# Altium PCB STM32F10XV.PCBDOC (part 1 of 2)
Units mm, origin at the board's own origin, x right, y up, seen from the top; angles counter-clockwise.
Board outline 45.75 x 66.52 mm, 2 copper layers (Top Layer, Bottom Layer); 58 components, 99 nets, 365 pads, 37 vias.
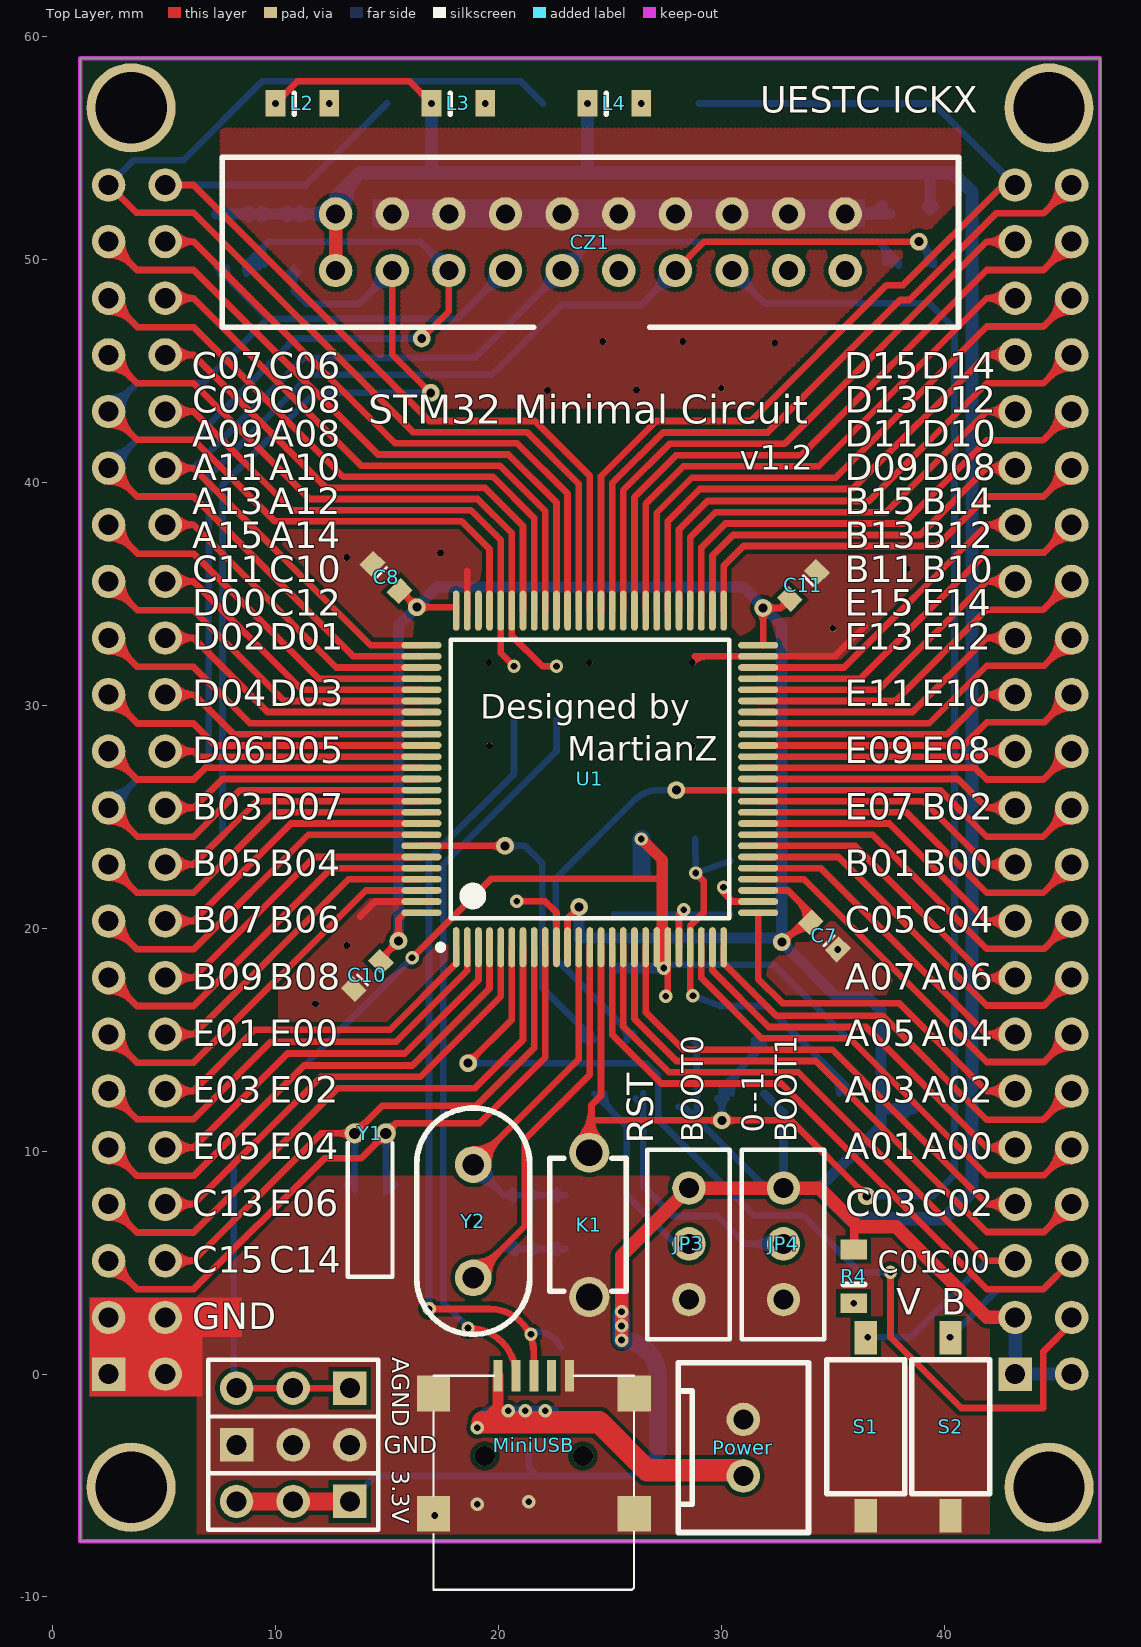
[diagram p0: Top Layer view]
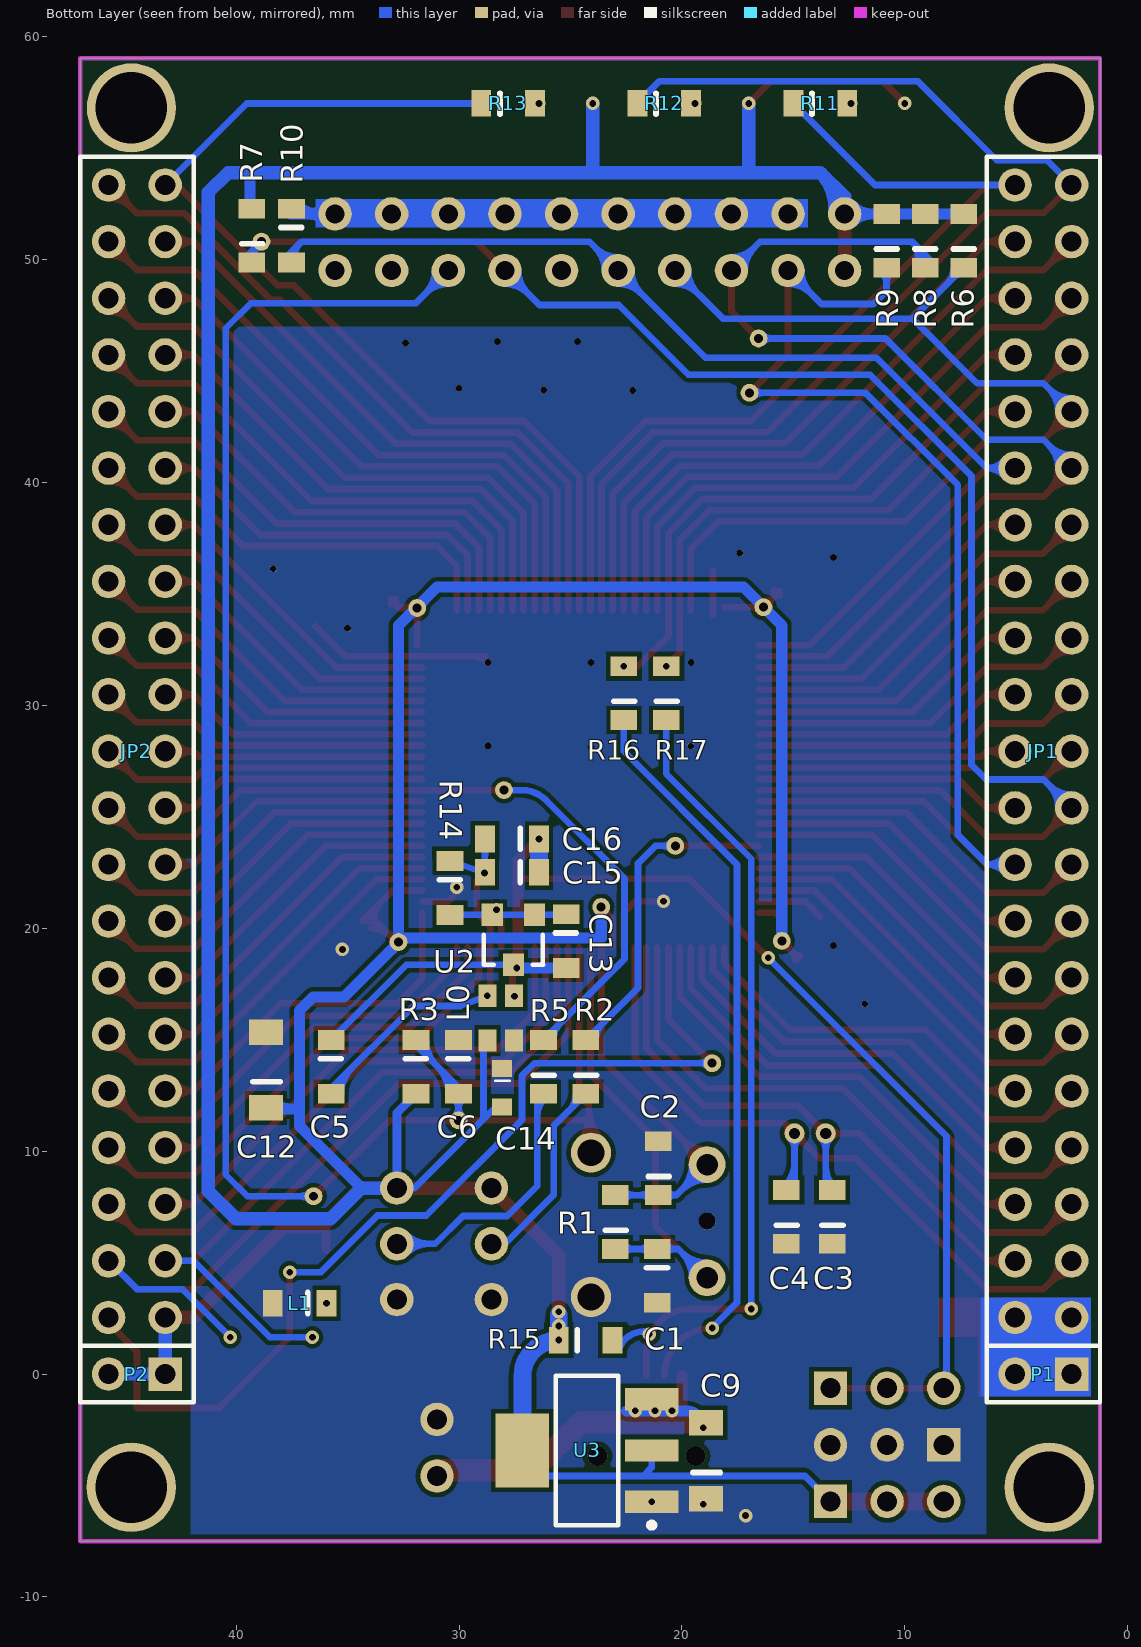
[diagram p1: Bottom Layer view, seen from below]

## Layer stack, top to bottom
Top Layer: signal copper 0.0356
Dielectric: dielectric 0.32, FR-4, Dk 4.8
Bottom Layer: signal copper 0.0356

## Board outline
1.245,59.025 46.99,59.025 46.99,-7.493 1.245,-7.493

## Design rules (kind name [scope] priority, off if disabled: settings)
Clearance [All] p1: gap=0.2
ComponentClearance [All] p1 off: gap=0.254 collisioncheckmode=3 verticalgap=0.254 showdistances=FALSE
FabricationTestPointUsage TestPointUsage [All] p1: valid=0 allowmultiple=FALSE
FabricationTestpoint Testpoint [All] p1: side=3 testpointundercomponent=TRUE minsize=1.016 maxsize=2.54 preferedsize=1.524 minholesize=0 maxholesize=1.016 preferedholesize=0.813 testpointgrid=0.025 allowsidetop=TRUE allowsidebottom=TRUE usegrid=TRUE gridtolerance=0
HoleSize [All] p1 off: absolutevalues=TRUE maxlimit=2.54 minlimit=0.025 maxpercent=80.000 minpercent=20.000
PlaneConnect [All] p1: planeconnectstyle=Direct reliefexpansion=0.508 reliefentries=4 reliefconductorwidth=0.254 reliefairgap=0.254
PolygonConnect [All] p1: connectstyle=Direct reliefconductorwidth=0.254 reliefentries=4 polygonreliefangle="90 Angle" airgapwidth=0.254
RoutingVias [All] p1: holewidth=0.711 width=1.27 viastyle="Through Hole" minholewidth=0.711 minwidth=1.27 maxholewidth=0.711 maxwidth=1.27
SilkscreenOverComponentPads [All] p1: minsilkscreentomaskgap=0.254
SolderMaskExpansion [All] p1: expansion=0.102
Width [All] p1: maxlimit=4 minlimit=0.254 preferedwidth=0.5 toplayer_prefwidth=0.3 minimp=50.000000 maximp=50.000000 favimp=50.000000
22 further rules are at their usual default settings.

## Components (designator, comment, footprint, x,y, rotation, side; value= is the part's Value field where it differs from the comment)
3.3V "3.3V" HDR1X3 13.335,-5.715 r180 top
AGND "AGND" HDR1X3 13.335,-0.635 r180 top
C1 "22P" 0805 21.107,5.613 r270 bottom
C2 "22P" 0805 21.057,8.026 r90 bottom
C3 "10P" 0805 13.259,5.842 r90 bottom
C4 "10P" 0805 15.316,5.842 r90 bottom
C5 "" 0805 35.738,14.986 r270 bottom
C6 "104" 0805 30.023,14.986 r270 bottom
C7 "" 0603 34.62,19.66 r135 top
C8 "" 0603 14.961,35.738 r315 top
C9 "Cap" 1206 18.923,-5.588 r90 bottom
C10 "" 0603 14.122,17.882 r45 top
C11 "" 0603 33.68,35.382 r225 top
C12 "10uF" 1206 38.659,11.938 r90 bottom
C13 "Cap" 0805 25.197,20.625 r270 bottom
C14 "Cap" 0603 28.067,12.852 r270 bottom
C15 "Cap" 0805 26.416,22.504 r0 bottom
C16 "Cap" 0805 26.416,24.003 r0 bottom
CZ1 "JTAG(20-PIN)" JP20_DOMNLOAD 12.7,49.505 r90 top locked
GND "GND" HDR1X3 8.255,-3.175 r0 top
JP1 "Header 21X2" HDR2X21 5.055,53.34 r270 bottom locked
JP2 "Header 21X2" HDR2X21 45.72,53.34 r270 bottom locked
JP3 "" KEY_22D00 28.55,5.842 r90 top locked
JP4 "" KEY_22D00 32.791,5.842 r90 top locked
K1 "" 棕色小按键开关 24.079,3.454 r90 top locked
L0 "ZJYS51R5-2P" DLW21SN121SQ2L 28.727,16.967 r270 bottom
L1 "" 0805 35.941,3.175 r0 bottom
L2 "LED0" 0805 10,57 r0 top
L3 "LED0" 0805 17,57 r0 top
L4 "LED0" 0805 24,57 r0 top
MiniUSB "miniUSB" miniUSB 21.59,-3.175 r90 top
P1 "Header 2" HDR1X2 2.515,0 r0 bottom
P2 "Header 2" HDR1X2 43.18,0 r0 bottom
Power "Header 2" XH2.54 30.988,-4.572 r90 top
R1 "1M" 0805 22.987,5.613 r90 bottom
R2 "10K" 0805 24.308,12.573 r90 bottom
R3 "10K" 0805 31.928,14.986 r270 bottom
R4 "1K" 0805 35.941,3.175 r90 top
R5 "10K" 0805 26.213,12.573 r90 bottom
R6 "10K" 0805 7.366,49.632 r90 bottom
R7 "10K" 0805 39.294,49.86 r90 bottom
R8 "10K" 0805 9.093,49.632 r90 bottom
R9 "10K" 0805 10.82,49.632 r90 bottom
R10 "10K" 0805 37.516,52.273 r270 bottom
R11 "1K" 0805 15,57 r180 bottom
R12 "1K" 0805 22,57 r180 bottom
R13 "1K" 0805 29,57 r180 bottom
R14 "10K" 0805 30.404,23.012 r270 bottom
R15 "Res2" 0805 25.527,1.524 r180 bottom
R16 "Res2" 0805 22.606,29.337 r90 bottom
R17 "Res2" 0805 20.701,29.337 r90 bottom
S1 "SW-PB" key-tiepian 38.227,0.635 r270 top
S2 "SW-PB" key-tiepian 42.037,0.635 r270 top
U1 "STM32F103VET6" LQFP100_N 24.105,26.695 r90 top locked
U2 "TL431" SOT23-3 27.559,19.482 r0 bottom
U3 "LM1117IMPX-3.3" MP04A_N 24.257,-3.429 r0 bottom
Y1 "32.768K" 2*6晶振 14.249,10.795 r0 top locked
Y2 "8M" XTAL 18.872,6.858 r90 top locked

## Footprints (in the part's own frame and the unit in brackets; to place one, negate y for a bottom-side part, rotate by r counter-clockwise, add the part's x,y. Pads: shape width x height; smd on the part's side, far side on the other; paste and mask are expansions set on the pad)
2*6晶振 [mm]
  round 0.9 hole 0.5: 1(-0.7,0) 2(0.7,0)
  silkscreen extent -1,-6.43 1,-0.43
0603 [mil]
  rect 30x35 smd: 1(-34,0) 2(34,0)
  silkscreen extent -12,-12 -12,13
0805 [mil]
  rect 35x47 smd: 1(0,0) 2(95,0)
  silkscreen extent 33,-19 33,18
1206 [mil]
  rect 45x60 smd: 1(0,0) 2(134,0)
  silkscreen extent 46,-25 46,23
DLW21SN121SQ2L [mm]
  rect 1x0.8 smd: 1(0,1.2) 2(0,0) 3(2,0) 4(2,1.2)
  body extent 0,0 2,1.2, height 1.2
HDR1X2 [mm] "Connector; Header; 2 Position"
  rect 1.5x1.5 hole 0.9: 1(0,0)
  round 1.5 hole 0.9: 2(2.54,0)
  silkscreen extent -1.27,-1.27 3.81,1.27
HDR1X3 [mm] "Connector; Header; 3 Position"
  rect 1.5x1.5 hole 0.9: 1(0,0)
  round 1.5 hole 0.9: 2(2.54,0) 3(5.08,0)
  silkscreen extent -1.27,-1.27 6.35,1.27
HDR2X21 [mm]
  round 1.5 hole 0.9: 1(0,0) 2(0,2.54) 3(2.54,0) 4(2.54,2.54) 5(5.08,0) 6(5.08,2.54) 7(7.62,0) 8(7.62,2.54) 9(10.16,0) 10(10.16,2.54) 11(12.7,0) 12(12.7,2.54) 13(15.24,0) 14(15.24,2.54) 15(17.78,0) 16(17.78,2.54) 17(20.32,0) 18(20.32,2.54) 19(22.86,0) 20(22.86,2.54) 21(25.4,0) 22(25.4,2.54) 23(27.94,0) 24(27.94,2.54) 25(30.48,0) 26(30.48,2.54) 27(33.02,0) 28(33.02,2.54) 29(35.56,0) 30(35.56,2.54) 31(38.1,0) 32(38.1,2.54) 33(40.64,0) 34(40.64,2.54) 35(43.18,0) 36(43.18,2.54) 37(45.72,0) 38(45.72,2.54) 39(48.26,0) 40(48.26,2.54) 41(50.8,0) 42(50.8,2.54)
  silkscreen extent -1.27,-1.27 52.07,3.81
JP20_DOMNLOAD [mm]
  round 1.5 hole 0.85: 1(0,0) 2(2.54,0) 3(0,-2.54) 4(2.54,-2.54) 5(0,-5.08) 6(2.54,-5.08) 7(0,-7.62) 8(2.54,-7.62) 9(0,-10.16) 10(2.54,-10.16) 11(0,-12.7) 12(2.54,-12.7) 13(0,-15.24) 14(2.54,-15.24) 15(0,-17.78) 16(2.54,-17.78) 17(0,-20.32) 18(2.54,-20.32) 19(0,-22.86) 20(2.54,-22.86)
  silkscreen extent -2.54,-27.94 5.08,5.08
key-tiepian [mm]
  rect 1.5x1 smd: 1(-1,-1.75) 2(7,-1.75)
  silkscreen extent 0,-3.5 6,0
KEY_22D00 [mm]
  round 1.5 hole 0.9: 1(-2.5,0) 2(0,0) 3(2.5,0)
  silkscreen extent -4.28,-1.82 4.22,1.88
LQFP100_N [mm]
  oval 1.8x0.3 smd: 1(-7.55,6) 2(-7.55,5.5) 3(-7.55,5) 4(-7.55,4.5) 5(-7.55,4) 6(-7.55,3.5) 7(-7.55,3) 8(-7.55,2.5) 9(-7.55,2) 10(-7.55,1.5) 11(-7.55,1) 12(-7.55,0.5) 13(-7.55,0) 14(-7.55,-0.5) 15(-7.55,-1) 16(-7.55,-1.5) 17(-7.55,-2) 18(-7.55,-2.5) 19(-7.55,-3) 20(-7.55,-3.5) 21(-7.55,-4) 22(-7.55,-4.5) 23(-7.55,-5) 24(-7.55,-5.5) 25(-7.55,-6) 51(7.55,-6) 52(7.55,-5.5) 53(7.55,-5) 54(7.55,-4.5) 55(7.55,-4) 56(7.55,-3.5) 57(7.55,-3) 58(7.55,-2.5) 59(7.55,-2) 60(7.55,-1.5) 61(7.55,-1) 62(7.55,-0.5) 63(7.55,0) 64(7.55,0.5) 65(7.55,1) 66(7.55,1.5) 67(7.55,2) 68(7.55,2.5) 69(7.55,3) 70(7.55,3.5) 71(7.55,4) 72(7.55,4.5) 73(7.55,5) 74(7.55,5.5) 75(7.55,6)
  oval 0.3x1.8 smd: 26(-6,-7.55) 27(-5.5,-7.55) 28(-5,-7.55) 29(-4.5,-7.55) 30(-4,-7.55) 31(-3.5,-7.55) 32(-3,-7.55) 33(-2.5,-7.55) 34(-2,-7.55) 35(-1.5,-7.55) 36(-1,-7.55) 37(-0.5,-7.55) 38(0,-7.55) 39(0.5,-7.55) 40(1,-7.55) 41(1.5,-7.55) 42(2,-7.55) 43(2.5,-7.55) 44(3,-7.55) 45(3.5,-7.55) 46(4,-7.55) 47(4.5,-7.55) 48(5,-7.55) 49(5.5,-7.55) 50(6,-7.55) 76(6,7.55) 77(5.5,7.55) 78(5,7.55) 79(4.5,7.55) 80(4,7.55) 81(3.5,7.55) 82(3,7.55) 83(2.5,7.55) 84(2,7.55) 85(1.5,7.55) 86(1,7.55) 87(0.5,7.55) 88(0,7.55) 89(-0.5,7.55) 90(-1,7.55) 91(-1.5,7.55) 92(-2,7.55) 93(-2.5,7.55) 94(-3,7.55) 95(-3.5,7.55) 96(-4,7.55) 97(-4.5,7.55) 98(-5,7.55) 99(-5.5,7.55) 100(-6,7.55)
  silkscreen extent -7.67,-6.25 6.25,6.82
miniUSB [mm]
  rect 1.4x0.4 smd: 1(3.1,1.6) 2(3.1,0.8) 3(3.1,0) 4(3.1,-0.8) 5(3.1,-1.6)
  rect 1.6x1.5 smd: 6(-3.1,4.5) 6(-3.1,-4.5) 6(2.3,4.5) 6(2.3,-4.5)
  silkscreen extent -6.5,-4.5 3.1,4.5, body extent -6.53,-5.03 3.61,4.95, height 3
MP04A_N [mm] "SOT223, 4-Leads, Body 6.5x3.5mm, Pitch 2.3mm, Lead Span 7mm, IPC Medium Density"
  rect 2.4x1 smd: 1(-2.9,2.3) 2(-2.9,0) 3(-2.9,-2.3)
  rect 2.4x3.3 smd: 4(2.9,0)
  silkscreen extent -3.02,-3.35 1.4,3.47, body extent -1.85,-3.35 1.85,3.35, height 1.8
SOT23-3 [mm] "SOT-23; 3 Leads; Body 3.0 x 2.5 mm, inc. l"
  rect 0.95x1 smd: 1(-0.95,-1.125) 2(0.95,-1.125) 3(0,1.125)
  silkscreen extent -1.33,-0.22 1.33,1.13
XH2.54 [mm]
  round 1.5 hole 0.9: 1(0,0) 2(2.54,0)
  silkscreen extent -2.54,-2.92 5.08,2.92
XTAL [mil]
  round 65 hole 38: 1(-100,0) 2(100,0)
  silkscreen extent -200,-100 200,100
棕色小按键开关 [mm]
  round 1.8 hole 1.2: 1(0,0) 2(6.477,0)
  silkscreen extent 0.25,-1.65 6.22,1.78

## Part data
3.3V AGND GND JP3 JP4: library part "Header 3", "Header, 3-Pin"
C1 C2 C3 C4 C5 C6 C7 C8 C10 C11: library part Cap, "Capacitor"
C9 C14 C15 C16: "Capacitor"
C12: library part "Cap Pol2", "Polarized Capacitor (Axial)"
JP1 JP2: "Header, 22-Pin, Dual row"
L1: library part 方?
L2 L3 L4: "Typical INFRARED GaAs LED"
P1 P2 Power: "Header, 2-Pin"
R1 R2 R3 R4 R5 R6 R7 R8 R9 R10 R11 R12 R13: library part Res2, "Resistor"
R15 R16 R17: "Resistor"
S1 S2: "Switch"
U1: library part STM32F101V8T6, "STM32 ARM-based 32-bit MCU with 64 Kbytes Flash, 100-pin LQFP, Industrial Temperature"
U3: "800mA Low-Dropout Linear Regulator, 4-pin SOT-223"
Y1: library part XTAL, "Crystal Osc"
Y2: library part XTAL, "Crystal Oscillator"

## Free pads (board coordinates)
  round 4 hole 3.2: 0(3.525,-5.08) 0(3.525,56.8) 0(44.7,56.8) 0(44.704,-5.08)
  round 0.8 hole 0.4: 0(15.519,19.431) 0(16.343,34.402) 0(16.561,46.457) 0(16.967,44.018) 0(18.644,13.945) 0(20.297,23.695) 0(23.622,20.955) 0(27.983,26.195) 0(30.023,11.379) 0(31.877,34.366) 0(32.715,19.38) 0(36.525,7.976) 0(38.862,50.8)
  round 0.762 hole 0.762: 0(18.872,6.858)
  round 0.3 hole 0.3: 3(13.2,36.627) 4(17.4,36.83) 5(35,33.452) 6(38.329,36.12) 7(19.583,31.92) 8(24.079,31.92) 9(28.702,31.92) 11(24.079,28.12) 14(28.702,28.171) 15(19.6,28.169) 16(11.8,16.612) 17(13.2,19.228) 20(22.2,44.12) 21(26.2,44.145) 22(30,44.221) 23(28.27,46.32) 24(32.4,46.253) 25(24.689,46.32)

## Via types
v1: diameter 0.6, hole 0.3, Top Layer to Bottom Layer, tented both sides, 12 vias
v2: diameter 0.6, hole 0.3, Top Layer to Bottom Layer, 8 vias
v3: diameter 0.6, hole 0.3, Top Layer to Bottom Layer, tented top, 8 vias
v4: diameter 0.6, hole 0.3, Top Layer to Bottom Layer, tented bottom, 7 vias
v5: diameter 0.9, hole 0.9, Top Layer to Bottom Layer, 2 vias

## Nets (pads, with @x,y where several pads share a name; then routed paths per layer and width w, separated by ;. In a path a pad name is that pad's centre, name@x,y a point inside that pad or via, vN(x,y) a via of type N, cw(c..) or ccw(c..) an arc to the next point about the centre after c; other vN are vias at no path point)
3.3V: 3.3V.1 3.3V.2 3.3V.3 C7.2 C8.2 C10.2 C11.2 C12.1 C14.2 CZ1.1 CZ1.2 JP2.42 JP3.3 JP4.3 L0.3 L2.1 L3.1 L4.1 P2.1 P2.2 pad.0@15.519,19.431 pad.0@16.343,34.402 pad.0@23.622,20.955 pad.0@31.877,34.366 pad.0@32.715,19.38 R3.2 R4.2 R6.2 R7.2 R8.2 R9.2 R15.1 U1.11 U1.28 U1.50 U1.75 U1.100 U3.2 U3.4 | length 296.6
  Top Layer w0.3: v2(10,57) 11,58 16,58 v2(17,57) ; C10.2@14.688,18.768 ccw(c14.688,19.175) 14.976,18.887 ; C10.2@14.733,18.645 pad.0@15.519,19.431 15.519,20.396 15.819,20.695 U1.100@16.555,20.695 ; C10.2@14.919,18.537 cw(c15.628,18.537) 15.127,19.038 ; pad.0@15.269,19.431 cw(c14.666,19.431) 15.093,19.004 cw(c15.519,18.577) pad.0@15.519,19.181 ; pad.0@15.343,19.608 ccw(c14.916,20.035) 15.519,20.035 ccw(c16.123,20.035) pad.0@15.696,19.608 ; C8.2@15.616,34.941 cw(c15.616,34.489) 15.936,34.809 ; C8.2@15.617,35.127 pad.0@16.343,34.402 U1.75@18.105,34.402 ; C8.2@15.847,35.172 ccw(c16.51,35.172) 16.041,34.703 ; pad.0@16.093,34.402 ccw(c15.489,34.402) 15.916,34.829 ccw(c16.343,35.256) pad.0@16.343,34.652 ; pad.0@16.519,34.225 cw(c16.946,33.798) 16.946,34.402 cw(c16.946,35.006) pad.0@16.519,34.579 ; U1.11@23.105,19.145 23.105,20.438 pad.0@23.622,20.955 ; U1.28@31.655,21.695 32.991,21.695 C7.2@34.341,20.345 ; pad.0@31.7,34.189 cw(c31.273,33.763) 31.877,33.763 cw(c32.481,33.763) 32.054,34.189 cw(c32.481,33.763) 32.481,34.366 cw(c32.481,34.97) pad.0@32.054,34.543 ; U1.50@31.877,32.695 pad.0@31.877,34.366 32.664,34.366 C11.2@33.07,34.772 ; pad.0@32.715,19.38 32.791,19.38 C7.2@33.782,20.371 ; pad.0@32.715,19.63 ccw(c32.715,20.418) 33.272,19.861 ; C11.2@32.839,34.772 cw(c32.281,34.772) 32.675,34.377 cw(c33.07,33.983) C11.2@33.07,34.541 ; pad.0@32.965,19.38 cw(c33.385,19.38) 33.088,19.677 ; pad.0@33.01,19.599 cw(c33.965,18.645) C7.2@33.965,19.994 ; 33.436,21.25 cw(c32.501,20.315) C7.2@33.823,20.315 ; 33.522,20.111 cw(c33.965,19.669) C7.2@33.965,20.294 ; C7.2@33.948,20.738 cw(c33.526,20.315) C7.2@34.123,20.315
  Top Layer w0.4: R4.2@35.966,5.588 35.966,6.78
  Top Layer w0.6: CZ1.1@12.7,49.505 CZ1.2@12.7,52.045 ; v4(25.527,1.524) 25.527,5.319 JP3.3@28.55,8.342 JP4.3@32.791,8.342 34.406,8.342 36.136,6.612 37.838,6.612 41.91,2.54 JP2.42@43.18,2.54
  Top Layer w0.8: 3.3V.3@8.255,-5.715 3.3V.2@10.795,-5.715 3.3V.1@13.335,-5.715
  Bottom Layer w0.3: 3.3V.1@13.335,-5.715 14.478,-4.572 21.738,-4.572 ; U3.2@21.357,-3.429 21.357,-4.191 21.738,-4.572 ; U3.4@27.157,-3.429 26.014,-4.572 21.738,-4.572 ; C14.2@28.067,11.989 28.353,11.989 28.905,11.436 ; L0.3@28.727,14.967 28.905,14.789 28.905,11.436 ; JP4.3@32.791,8.342 31.999,8.342 28.905,11.436
  Bottom Layer w0.4: R3.2@31.928,12.573 32.791,11.709 JP4.3@32.791,8.342
  Bottom Layer w0.5: R6.2@7.366,52.045 CZ1.2@12.7,52.045 ; R6.2@7.656,51.907 cw(c7.988,51.575) 7.988,52.045 cw(c7.988,52.514) R6.2@7.656,52.182 ; R8.2@8.803,51.907 ccw(c8.471,51.575) 8.471,52.045 ccw(c8.471,52.514) R8.2@8.803,52.182 ; R8.2@9.383,51.907 cw(c9.715,51.575) 9.715,52.045 cw(c9.715,52.514) R8.2@9.383,52.182 ; R9.2@10.53,51.907 ccw(c10.198,51.575) 10.198,52.045 ccw(c10.198,52.514) R9.2@10.53,52.182 ; R9.2@11.11,51.907 cw(c11.442,51.575) 11.442,52.045 cw(c11.442,52.514) R9.2@11.11,52.182 ; CZ1.2@12.346,51.691 ccw(c11.493,50.837) 11.493,52.045 ccw(c11.493,53.252) CZ1.2@12.346,52.398 ; pad.0@15.519,19.431 15.519,33.579 17.247,35.306 30.988,35.306 32.715,33.579 32.715,19.355 35.154,16.916 36.551,16.916 37.16,16.307 37.16,11.121 34.381,8.342 ; pad.0@23.622,20.955 23.622,19.558 32.537,19.558 pad.0@32.715,19.38 ; 31.585,34.709 cw(c31.242,34.366) pad.0@31.727,34.366 ; pad.0@31.877,34.216 cw(c31.877,33.731) 32.22,34.074 ; pad.0@32.865,19.38 ccw(c33.289,19.38) 32.989,19.081 ; 37.16,11.887 C12.1@38.608,11.887 ; 37.569,11.887 ccw(c37.569,12.837) C12.1@38.241,12.165 ; 37.815,11.887 cw(c37.815,11.284) C12.1@38.241,11.711 ; R7.2@39.232,52.36 ccw(c38.9,52.692) 39.37,52.692 ccw(c39.84,52.692) R7.2@39.508,52.36 ; R7.2@39.37,52.222 39.37,53.873
  Bottom Layer w0.6: CZ1.2@12.483,52.439 ccw(c12.28,52.807) 12.7,52.807 ; CZ1.2@12.551,52.029 cw(c13.752,52.151) 12.898,53.005 ; CZ1.2@12.7,52.045 12.7,52.807 ; CZ1.2@12.917,52.439 cw(c13.12,52.807) 12.7,52.807 ; CZ1.2@13.148,52.09 cw(c15.375,52.315) 13.792,53.899 ; v2(17,57) 17,53.899 ; v2(24,57) 24,53.899 ; JP4.3@32.791,8.342 34.326,8.342 ; 34.353,8.369 34.326,8.342 ; JP2.42@43.18,2.54 P2.1@43.18,0 P2.2@45.72,0 ; 12.7,52.807 13.792,53.899 ; 13.792,53.899 17,53.899 ; 17,53.899 24,53.899 ; 24,53.899 40.361,53.899 41.25,53.01 41.25,8.204 40.005,6.96 35.763,6.96 34.381,8.342 34.326,8.342
  Bottom Layer w0.8: v1@25.527,2.667 v4(25.527,1.524) cw(c25.527,-0.106) 27.157,-0.106 U3.4@27.157,-3.429
  other v1: 25.527,2.159 25.527,2.794
A3.3V: C5.2 C15.2 C16.2 L0.2 R14.1 U1.22 | length 20
  Top Layer w0.3: v3(28.727,16.967) cw(c29.024,17.264) 28.605,17.264 U1.22@28.605,19.145 28.605,20.103 29.21,20.708 29.21,22.123 v2(28.854,22.479)
  Bottom Layer w0.3: v3(28.727,16.967) 29.947,16.51 32.029,16.51 35.738,12.802 C5.2@35.738,12.573 ; C16.2@28.829,24.003 v2(28.854,22.479) R14.1@30.404,23.012 ; 34.813,13.726 cw(c33.66,12.573) C5.2@35.291,12.573 ; 35.325,13.214 cw(c34.684,12.573) C5.2@35.591,12.573
AGND: AGND.1 AGND.2 AGND.3 C5.1 C13.2 C15.1 C16.1 L0.1 U1.19 U1.20 U2.3 | length 61.1
  Top Layer w0.3: AGND.3@8.255,-0.635 AGND.2@10.795,-0.635 AGND.1@13.335,-0.635 ; v1(16.129,18.669) 19.685,22.225 27.355,22.225 ; v3@27.605,18.212 v3@27.605,17.175 ; v3@27.605,17.175 cw(c27.275,17.175) v3(27.508,16.942) ccw(c27.275,17.175) v3@27.605,17.175
  Top Layer w0.5: v3(26.416,24.003) 27.355,23.064 27.355,22.225 27.355,18.271 v3(27.414,18.212)
  Bottom Layer w0.3: AGND.3@8.128,-0.254 8.128,10.668 v1(16.129,18.669) ; U2.3@27.559,18.357 32.367,18.357 C5.1@35.738,14.986
  Bottom Layer w0.5: C13.2@25.197,18.212 v3(27.414,18.212)
  Bottom Layer w0.8: v3(26.416,24.003) C15.1@26.416,22.504 C15.1@26.441,22.479
BAT: JP2.41 pad.0@18.644,13.945 U1.6 | length 47.6
  Top Layer w0.3: pad.0@18.644,13.945 20.605,15.906 U1.6@20.605,19.145 ; pad.0@18.644,14.195 ccw(c18.644,14.798) 19.07,14.371 ccw(c19.497,13.945) pad.0@18.894,13.945 ; v1(37.592,4.572) 37.592,1.651 40.767,-1.524 44.45,-1.524 44.45,1.016 45.72,2.286 JP2.41@45.72,2.54
  Bottom Layer w0.3: pad.0@18.644,13.945 26.619,13.945 27.178,13.386 27.178,11.405 31.471,7.112 33.655,7.112 36.195,4.572 v1(37.592,4.572) ; pad.0@18.82,13.768 cw(c19.247,13.341) 19.247,13.945 cw(c19.247,14.548) pad.0@18.82,14.121
DIN: C9.2 MiniUSB.1 Power.1 U3.3 | length 19.2
  Top Layer w0.5: v3(19.05,-2.413) 19.304,-2.159 19.99,-1.473 MiniUSB.1@19.99,-0.075
  Top Layer w1: 19.304,-2.159 24.511,-2.159 26.67,-4.318 Power.1@30.988,-4.318
  Bottom Layer w0.5: C9.2@19.05,-2.438 cw(c19.837,-2.438) 19.837,-1.651 22.479,-1.651
  other v4: 20.447,-1.651 21.209,-1.651 22.098,-1.651
GND: C1.2 C2.2 C3.1 C4.1 C6.1 C7.1 C8.1 C9.1 C10.1 C11.1 C12.2 C14.1 CZ1.4 CZ1.6 CZ1.8 CZ1.10 CZ1.12 CZ1.14 CZ1.16 CZ1.18 CZ1.20 GND.1 GND.2 GND.3 JP1.41 JP1.42 JP3.1 JP4.1 K1.1 L0.4 L1.2 MiniUSB.5 MiniUSB.6 P1.1 P1.2 pad.0@18.872,6.858 pad.3 pad.4 pad.5 pad.6 pad.7 pad.8 pad.9 pad.11 pad.14 pad.15 pad.16 pad.17 pad.20 pad.21 pad.22 pad.23 pad.24 pad.25 Power.2 R10.1 S1.2 S2.2 U1.10 U1.27 U1.49 U1.74 U1.99 U3.1 | length 24.4
  Top Layer w0.3: 13.8,20.526 14.135,20.861 14.469,21.195 U1.99@16.555,21.195 ; U1.74@18.605,34.036 18.605,36.038 ; v1(20.828,21.209) 22.098,21.209 22.605,20.702 U1.10@22.605,19.145 ; pad.9@28.702,31.92 cw(c29.367,31.255) 29.367,32.195 ; 28.817,32.195 35.086,32.195 36.438,33.547 ; v1(30.099,21.844) 30.099,21.59 30.494,21.195 U1.27@31.655,21.195
  Bottom Layer w0.5: CZ1.20@35.56,52.045 R10.1@37.567,52.045 ; CZ1.20@35.914,51.691 cw(c36.767,50.837) 36.767,52.045 cw(c36.767,53.252) CZ1.20@35.914,52.398 ; 36.342,52.045 ccw(c36.342,53.295) R10.1@37.226,52.411
  other v1: 17.145,-6.35 19.05,-5.842 21.357,-5.729
  other v4: 35.231,19.049
JNTRST: CZ1.3 JP1.25 pad.0@16.967,44.018 R9.1 U1.90 | length 63
  Top Layer w0.3: JP1.25@5.055,22.86 6.325,22.86 ; JP1.25@5.518,22.479 cw(c6.325,21.816) 6.325,22.86 ; JP1.25@5.518,23.241 ccw(c6.325,23.904) 6.325,22.86 ; CZ1.3@15.24,49.505 15.24,45.745 pad.0@16.967,44.018 ; U1.90@16.555,25.695 9.16,25.695 6.325,22.86
  Bottom Layer w0.3: JP1.25@5.055,22.86 6.299,22.86 ; JP1.25@5.524,22.486 cw(c6.299,21.869) 6.299,22.86 ; JP1.25@5.524,23.234 ccw(c6.299,23.851) 6.299,22.86 ; R9.1@10.612,49.423 cw(c10.109,48.921) 10.82,48.921 cw(c11.531,48.921) R9.1@11.029,49.423 ; R9.1@10.82,49.632 10.82,48.59 11.405,48.006 13.741,48.006 CZ1.3@15.24,49.505 ; CZ1.3@14.64,49.505 cw(c13.191,49.505) 14.216,48.48 cw(c15.24,47.456) CZ1.3@15.24,48.905 ; pad.0@16.79,43.841 ccw(c16.364,43.415) 16.364,44.018 ccw(c16.364,44.622) pad.0@16.79,44.195 ; pad.0@16.967,44.018 11.76,44.018 7.62,39.878 7.62,24.181 6.299,22.86
JTCK: CZ1.9 JP1.11 R10.2 U1.76 | length 62.2
  Top Layer w0.3: JP1.11@5.055,40.64 6.325,40.64 ; JP1.11@5.518,40.259 cw(c6.325,39.596) 6.325,40.64 ; JP1.11@5.518,41.021 ccw(c6.325,41.684) 6.325,40.64 ; U1.76@16.555,32.695 14.269,32.695 6.325,40.64
  Bottom Layer w0.3: JP1.11@5.055,40.64 6.325,40.64 ; JP1.11@5.518,40.259 cw(c6.325,39.596) 6.325,40.64 ; JP1.11@5.518,41.021 ccw(c6.325,41.684) 6.325,40.64 ; CZ1.9@22.26,49.505 cw(c20.811,49.505) 21.836,48.48 cw(c22.86,47.456) CZ1.9@22.86,48.905 ; CZ1.9@22.86,50.105 ccw(c22.86,51.553) 23.884,50.529 ccw(c24.909,49.505) CZ1.9@23.46,49.505 ; 37.12,50.738 cw(c36.459,50.077) R10.2@37.369,49.859 ; 37.5,50.359 cw(c37.071,49.93) R10.2@37.661,49.789 ; R10.2@37.846,50.013 37.059,50.8 24.155,50.8 18.948,45.593 11.278,45.593 6.325,40.64 ; R10.2@37.879,49.98 cw(c37.683,49.784) R10.2@37.952,49.719
JTDI: CZ1.5 JP1.12 pad.0@16.561,46.457 R8.1 U1.77 | length 58.8
  Top Layer w0.3: JP1.12@2.515,40.04 cw(c2.515,38.591) 3.539,39.616 cw(c4.563,40.64) JP1.12@3.115,40.64 ; JP1.12@2.515,40.64 3.785,39.37 6.325,39.37 13.499,32.195 U1.77@16.555,32.195 ; pad.0@16.561,46.457 17.78,47.676 CZ1.5@17.78,49.505
  Bottom Layer w0.3: JP1.12@2.515,40.64 3.785,41.91 6.325,41.91 10.871,46.457 pad.0@16.561,46.457 ; JP1.12@2.515,41.24 ccw(c2.515,42.689) 3.539,41.664 ccw(c4.563,40.64) JP1.12@3.115,40.64 ; R8.1@8.687,49.809 9.677,50.8 ; R8.1@8.704,49.361 cw(c9.135,49.576) R8.1@8.794,49.917 ; R8.1@8.972,49.495 cw(c9.527,49.772) 9.089,50.211 ; R8.1@9.241,49.629 cw(c9.92,49.969) 9.383,50.506 ; R8.1@9.509,49.763 cw(c10.313,50.165) 9.677,50.8 ; pad.0@16.384,46.28 ccw(c15.957,45.853) 15.957,46.457 ccw(c15.957,47.06) pad.0@16.384,46.633 ; CZ1.5@17.18,49.505 ccw(c15.731,49.505) 16.756,50.529 ccw(c17.78,51.553) CZ1.5@17.78,50.105 ; CZ1.5@17.78,49.505 16.485,50.8 9.677,50.8
JTDO: CZ1.13 JP1.24 pad.0@38.862,50.8 R7.1 U1.89 | length 81
  Top Layer w0.3: JP1.24@2.515,24.8 cw(c2.515,23.351) 3.539,24.376 cw(c4.563,25.4) JP1.24@3.115,25.4 ; JP1.24@2.515,25.4 3.81,24.105 6.325,24.105 8.415,26.195 U1.89@16.555,26.195 ; CZ1.13@27.94,49.505 29.235,50.8 pad.0@38.862,50.8
  Bottom Layer w0.3: JP1.24@2.515,25.4 3.785,26.67 6.35,26.67 7.01,27.33 7.01,40.284 11.557,44.831 19.71,44.831 22.835,47.955 26.391,47.955 CZ1.13@27.94,49.505 ; JP1.24@2.515,26 ccw(c2.515,27.449) 3.539,26.424 ccw(c4.563,25.4) JP1.24@3.115,25.4 ; CZ1.13@27.34,49.505 cw(c25.891,49.505) 26.916,48.48 cw(c27.94,47.456) CZ1.13@27.94,48.905 ; pad.0@38.862,50.55 cw(c38.862,49.946) 39.289,50.373 cw(c39.716,50.8) pad.0@39.112,50.8 ; pad.0@38.862,50.8 R7.1@39.37,50.292 ; pad.0@38.944,50.718 cw(c38.227,50) R7.1@39.223,49.808 ; R7.1@39.235,50.071 ccw(c39.122,50.292) R7.1@39.37,50.292 ; 39.344,50.318 cw(c38.897,49.871) R7.1@39.518,49.752 ; R7.1@39.37,49.809 R7.1@39.37,50.292 ; R7.1@39.505,50.071 cw(c39.618,50.292) R7.1@39.37,50.292
JTMS: CZ1.7 JP1.10 R6.1 U1.72 | length 54
  Top Layer w0.3: JP1.10@2.515,42.58 cw(c2.515,41.131) 3.539,42.156 cw(c4.563,43.18) JP1.10@3.115,43.18 ; JP1.10@2.515,43.18 3.785,41.91 6.325,41.91 9.982,38.252 18.36,38.252 19.605,37.008 U1.72@19.605,34.245
  Bottom Layer w0.3: JP1.10@2.515,43.18 3.785,44.45 6.756,44.45 9.652,47.346 ; JP1.10@2.515,43.78 ccw(c2.515,45.229) 3.539,44.204 ccw(c4.563,43.18) JP1.10@3.115,43.18 ; R6.1@7.366,49.632 9.652,47.346 ; R6.1@7.518,49.337 cw(c7.518,48.994) R6.1@7.761,49.237 ; R6.1@7.813,49.632 ccw(c8.892,49.632) 8.129,48.869 ; CZ1.7@19.72,49.505 cw(c18.271,49.505) 19.296,48.48 cw(c20.32,47.456) CZ1.7@20.32,48.905 ; CZ1.7@20.32,49.505 18.161,47.346 9.652,47.346
NetC1_1: C1.1 R1.1 U1.13 Y2.1 | length 33
  Top Layer w0.3: Y2.1@18.872,4.318 21.184,6.629 21.184,10.516 24.105,13.437 U1.13@24.105,19.145 ; Y2.1@18.872,4.694 ccw(c18.872,5.6) 19.513,4.959 ccw(c20.154,4.318) Y2.1@19.248,4.318 ; Y2.1@18.872,4.994 ccw(c18.872,6.624) 20.025,5.471 ccw(c21.179,4.318) Y2.1@19.548,4.318
  Bottom Layer w0.3: Y2.1@18.872,4.318 20.168,5.613 R1.1@22.987,5.613 ; Y2.1@18.872,4.694 ccw(c18.872,5.6) 19.513,4.959 ccw(c20.154,4.318) Y2.1@19.248,4.318 ; Y2.1@18.872,4.994 ccw(c18.872,6.624) 20.025,5.471 ccw(c21.179,4.318) Y2.1@19.548,4.318 ; C1.1@20.747,5.405 ccw(c20.244,4.902) 20.244,5.613 ccw(c20.244,6.324) C1.1@20.747,5.822 ; C1.1@21.468,5.405 cw(c21.971,4.902) 21.971,5.613 cw(c21.971,6.324) C1.1@21.468,5.822 ; R1.1@22.626,5.405 ccw(c22.124,4.902) 22.124,5.613 ccw(c22.124,6.324) R1.1@22.626,5.822
NetC2_1: C2.1 R1.2 U1.12 Y2.2 | length 27.6
  Top Layer w0.3: Y2.2@18.872,9.398 23.605,14.13 U1.12@23.605,19.145 ; Y2.2@18.872,9.774 ccw(c18.872,10.68) 19.513,10.039 ccw(c20.154,9.398) Y2.2@19.248,9.398 ; Y2.2@18.872,10.074 ccw(c18.872,11.704) 20.025,10.551 ccw(c21.179,9.398) Y2.2@19.548,9.398
  Bottom Layer w0.3: Y2.2@18.872,8.722 cw(c18.872,7.092) 20.025,8.245 cw(c21.179,9.398) Y2.2@19.548,9.398 ; Y2.2@18.872,9.022 cw(c18.872,8.116) 19.513,8.757 cw(c20.154,9.398) Y2.2@19.248,9.398 ; Y2.2@18.872,9.398 20.244,8.026 ; C2.1@20.685,7.83 ccw(c20.244,7.433) 20.244,8.026 ; C2.1@20.685,8.223 cw(c20.244,8.62) 20.244,8.026 ; C2.1@21.417,7.818 cw(c21.92,7.315) 21.92,8.026 cw(c21.92,8.737) C2.1@21.417,8.235 ; R1.2@22.626,7.818 ccw(c22.124,7.315) 22.124,8.026 ccw(c22.124,8.737) R1.2@22.626,8.235 ; R1.2@22.987,8.026 20.244,8.026
NetJP3_2: JP3.2 R2.1 | length 10
  Bottom Layer w0.3: R2.1@24.308,12.573 25.756,11.125 25.756,8.026 27.94,5.842 JP3.2@28.55,5.842 ; R2.1@24.46,12.278 cw(c24.46,11.935) R2.1@24.703,12.178 ; R2.1@24.755,12.573 ccw(c25.834,12.573) 25.071,11.81
NetJP4_2: JP4.2 R5.1 | length 14.7
  Bottom Layer w0.3: R5.1@26.157,12.365 cw(c25.348,11.555) 26.492,11.555 ; R5.1@26.492,12.598 26.492,8.433 27.838,7.087 29.82,7.087 31.064,5.842 JP4.2@32.791,5.842 ; JP4.2@32.367,5.418 ccw(c31.343,4.393) 31.343,5.842 ccw(c31.343,7.291) JP4.2@32.367,6.266
NetL1_1: L1.1 R4.1
  other v2: 35.941,3.175
NetL2_2: L2.2 R11.2
  other v2: 12.413,57
NetL3_2: L3.2 R12.2
  other v2: 19.413,57
NetL4_2: L4.2 R13.2
  other v2: 26.413,57
NetMiniUSB_2: MiniUSB.2 R16.1 | length 33.2
  Top Layer w0.3: v1(18.639,2.062) 18.653,2.062 cw(c18.653,-0.075) MiniUSB.2@20.79,-0.075
  Bottom Layer w0.3: v1(18.639,2.062) 18.578,2.062 18.542,2.099 18.542,2.189 17.526,3.205 17.526,22.86 22.606,27.94 R16.1@22.606,29.337
NetMiniUSB_3: MiniUSB.3 R15.2 R17.1 | length 36.5
  Top Layer w0.3: v1(16.891,2.921) 19.61,2.921 cw(c19.61,0.941) 21.59,0.941 MiniUSB.3@21.59,-0.075
  Bottom Layer w0.3: v1(16.891,2.921) 16.891,23.114 20.701,26.924 R17.1@20.701,29.337 ; v1(21.463,1.778) 21.59,1.778 21.717,1.905 cw(c21.717,0.737) R15.2@22.794,1.189
NetR2_2: pad.0@20.297,23.695 R2.2 U1.94 | length 17.6
  Top Layer w0.3: U1.94@16.555,23.695 pad.0@20.297,23.695 ; pad.0@20.121,23.519 ccw(c19.694,23.092) 19.694,23.695 ccw(c19.694,24.299) pad.0@20.121,23.872
  Bottom Layer w0.3: pad.0@20.297,23.695 21.186,23.695 21.971,22.911 21.971,17.323 R2.2@24.308,14.986 ; pad.0@20.474,23.519 cw(c20.901,23.092) 20.901,23.695 cw(c20.901,24.299) pad.0@20.474,23.872 ; 23.545,15.749 cw(c22.782,14.986) R2.2@23.861,14.986 ; R2.2@23.913,15.381 ccw(c24.155,15.624) R2.2@24.155,15.281
NRST: C6.2 CZ1.15 K1.2 pad.0@30.023,11.379 pad.0@36.525,7.976 R3.1 U1.14 | length 96.8
  Top Layer w0.3: K1.2@23.549,10.462 ccw(c22.023,11.987) 24.181,11.987 ; K1.2@23.761,10.25 ccw(c22.748,11.263) 24.181,11.263 ; K1.2@23.948,10.67 ccw(c23.899,10.947) 24.181,10.947 ; 24.181,11.379 33.122,11.379 pad.0@36.525,7.976 ; 24.181,11.497 ccw(c25.645,11.497) K1.2@24.61,10.462 ; K1.2@24.395,10.612 cw(c24.551,10.947) 24.181,10.947 ; U1.14@24.605,19.145 24.605,12.489 24.181,12.065 24.181,10.947 ; pad.0@29.846,11.202 ccw(c29.419,10.776) 29.419,11.379 ccw(c29.419,11.983) pad.0@29.846,11.556 ; pad.0@30.2,11.202 cw(c30.626,10.776) 30.626,11.379 cw(c30.626,11.983) pad.0@30.2,11.556 ; pad.0@36.275,7.976 ccw(c35.672,7.976) 36.098,8.402 ccw(c36.525,8.829) pad.0@36.525,8.226
  Bottom Layer w0.3: C6.2@29.815,12.365 cw(c29.312,11.862) 30.023,11.862 cw(c30.734,11.862) C6.2@30.231,12.365 ; pad.0@29.846,11.556 ccw(c29.419,11.983) 30.023,11.983 ccw(c30.626,11.983) pad.0@30.2,11.556 ; pad.0@30.023,11.379 30.023,12.852 R3.1@31.928,14.757 ; C6.2@30.17,12.573 cw(c31.199,12.573) 30.471,13.301 ; C6.2@30.47,12.573 cw(c32.223,12.573) 30.983,13.813 ; CZ1.15@30.48,48.905 cw(c30.48,47.456) 31.504,48.48 cw(c32.529,49.505) CZ1.15@31.08,49.505 ; CZ1.15@30.48,49.505 31.953,48.031 39.345,48.031 40.462,46.914 40.462,8.941 39.497,7.976 pad.0@36.525,7.976 ; 31.003,13.833 ccw(c29.85,14.986) R3.1@31.481,14.986 ; 31.515,14.345 ccw(c30.874,14.986) R3.1@31.781,14.986 ; pad.0@36.702,7.799 cw(c37.129,7.372) 37.129,7.976 cw(c37.129,8.579) pad.0@36.702,8.152